# Altium PCB somiqboard.PcbDoc (part 8 of 10)
Units mm, origin at the board's own origin, x right, y up, seen from the top; angles counter-clockwise.
Board outline 110 x 96 mm, 4 copper layers (Top Layer, Ground_Plane, Power_Plane, Bottom Layer), stack 1.454 mm thick; 221 components, 356 nets, 1185 pads, 539 vias.
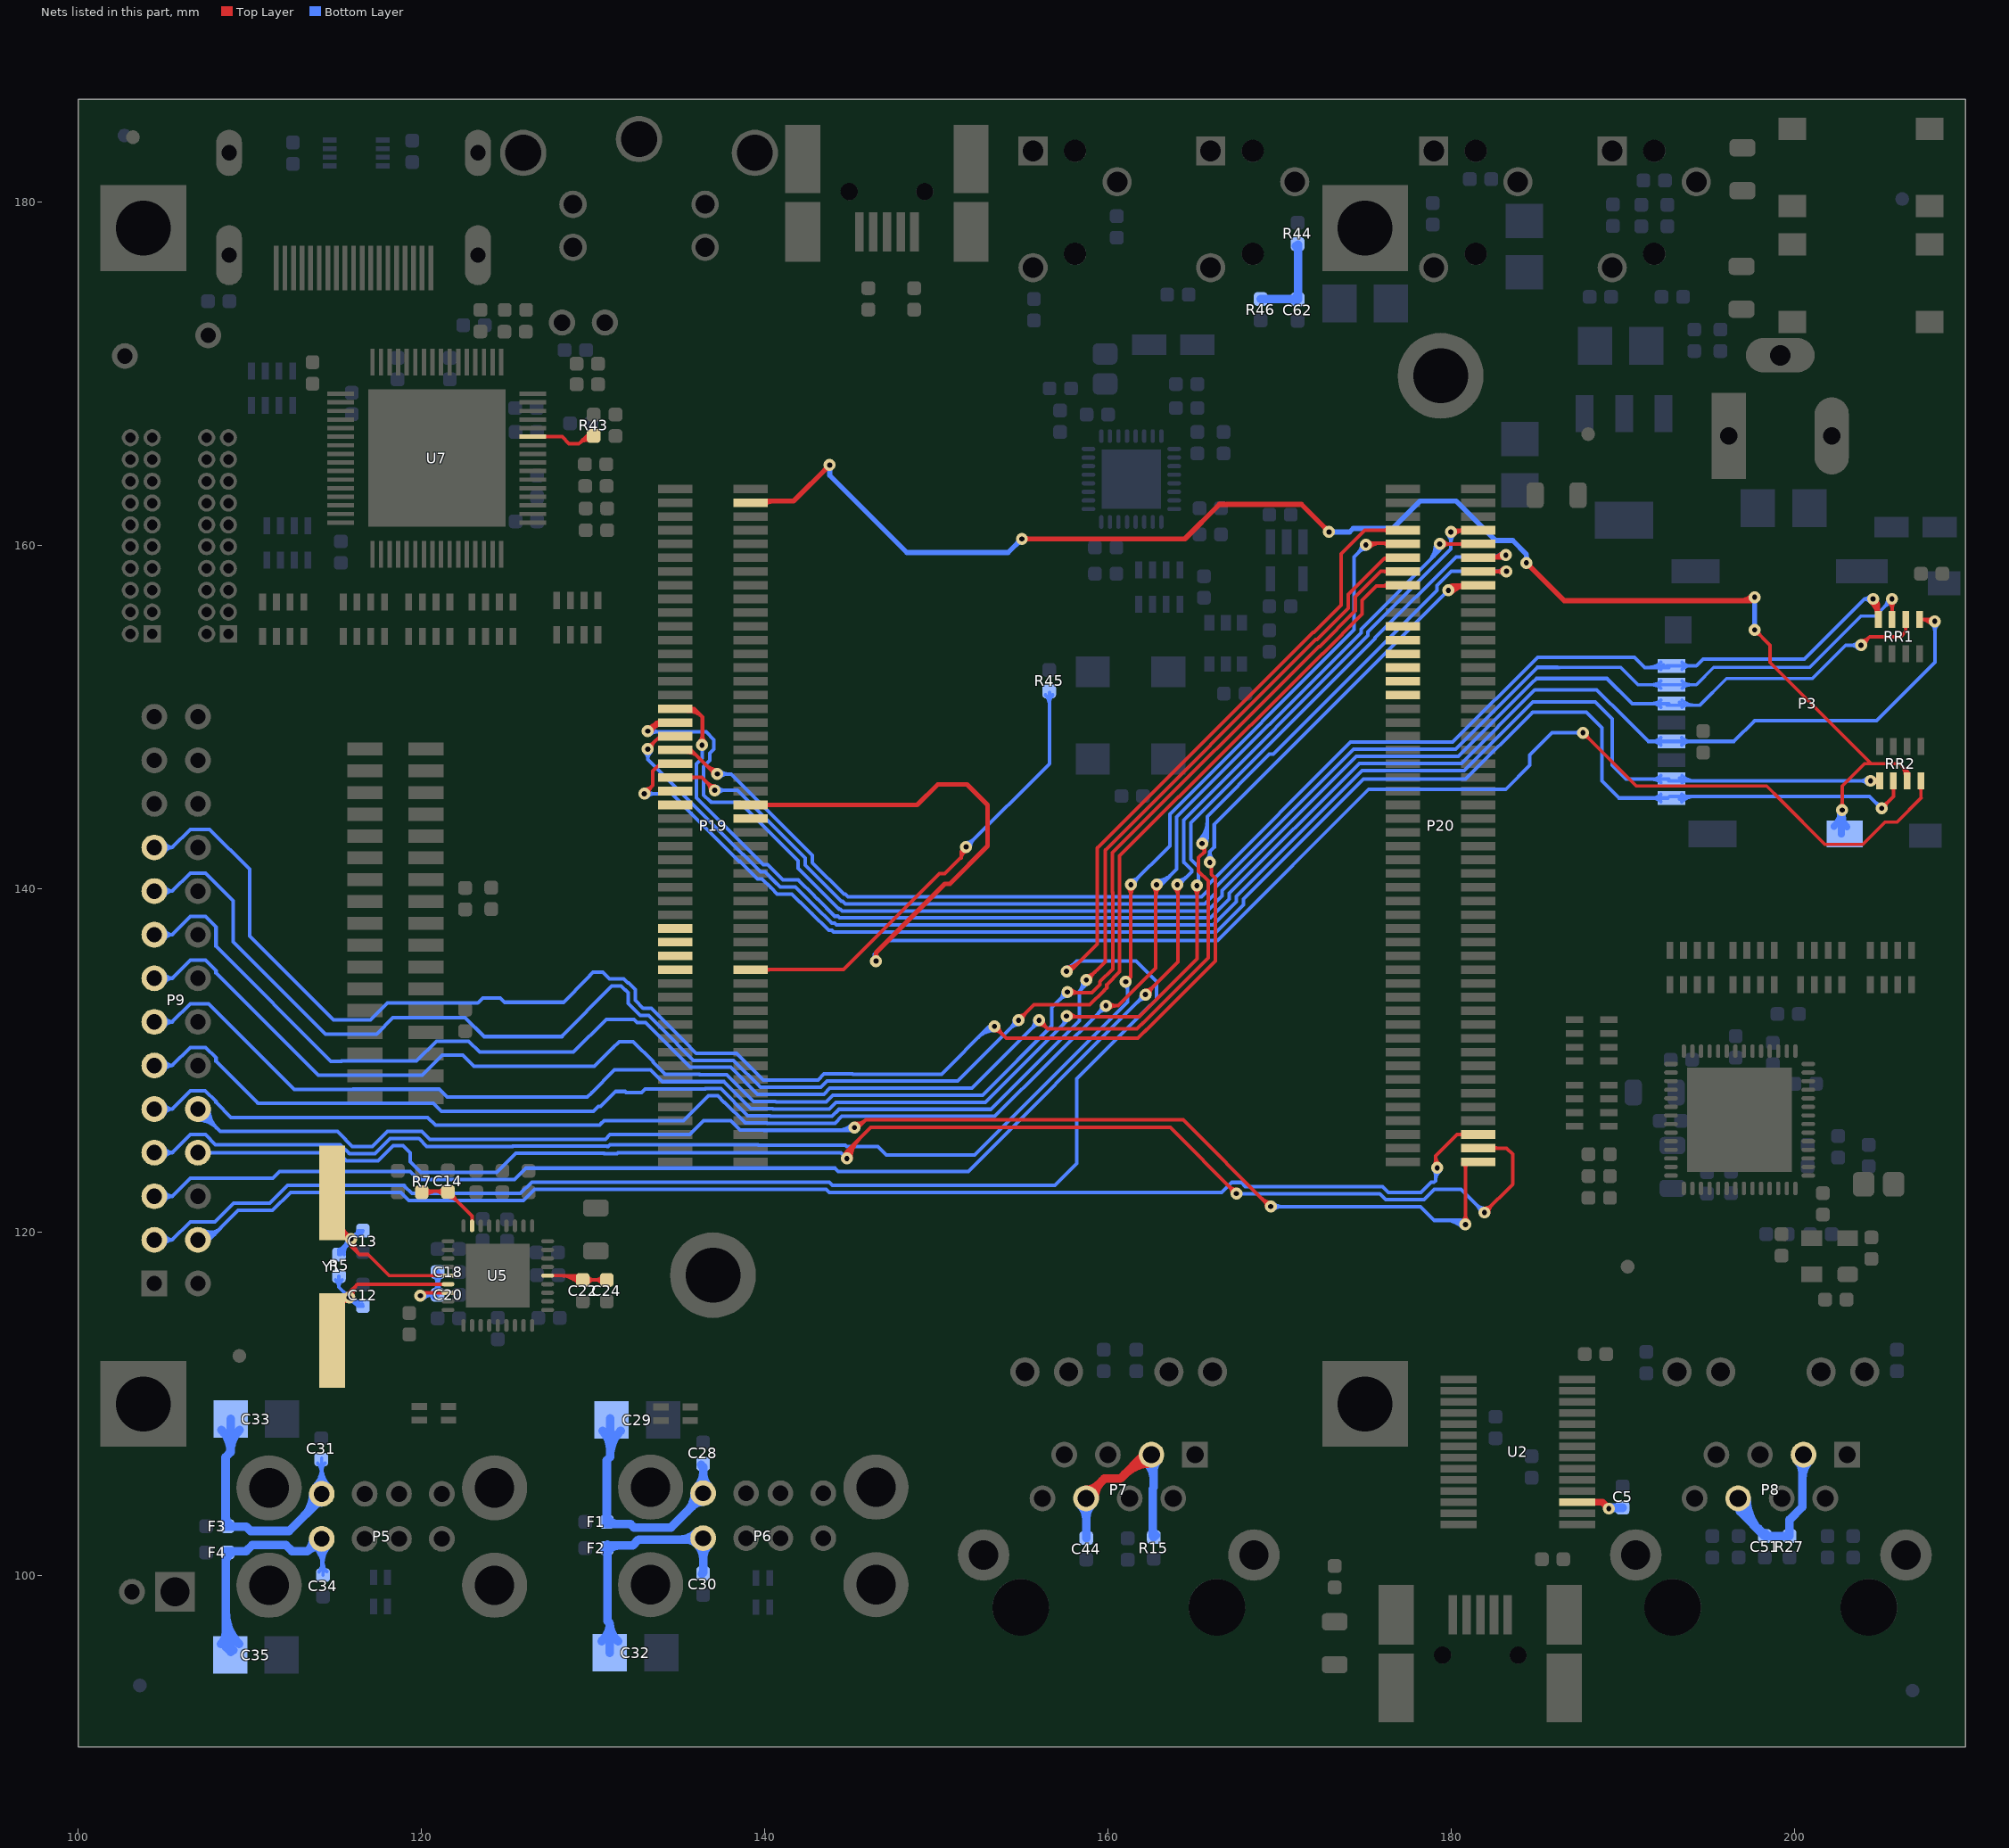
[diagram p10: the nets of this part, all layers, seen from the top]

## Via types
v1: diameter 0.7/0.7/0.7/0.7 (per signal layer), hole 0.3, Top Layer to Bottom Layer, tented both sides, 270 vias
v2: diameter 0.8, hole 0.3, Top Layer to Bottom Layer, tented both sides, 49 vias
v3: diameter 0.6/0.7/0.7/0.6 (per signal layer), hole 0.3, Top Layer to Bottom Layer, tented both sides, 47 vias
v4: diameter 0.6, hole 0.3, Top Layer to Bottom Layer, tented both sides, 43 vias
v5: diameter 1.1/1.1/1.1/1.1 (per signal layer), hole 0.6, Top Layer to Bottom Layer, tented both sides, 32 vias
v6: diameter 0.8/0.8/0.8/0.8 (per signal layer), hole 0.4, Top Layer to Bottom Layer, tented both sides, 31 vias
v7: diameter 0.9/0.9/0.9/0.9 (per signal layer), hole 0.5, Top Layer to Bottom Layer, tented both sides, 29 vias
v8: diameter 1.5/1.5/1.5/1.5 (per signal layer), hole 0.9, Top Layer to Bottom Layer, tented both sides, 14 vias
v9: diameter 1.2/1.2/1.2/1.2 (per signal layer), hole 0.6, Top Layer to Bottom Layer, tented both sides, 10 vias
v10: diameter 0.8/0.8/0.8/0.8 (per signal layer), hole 0.5, Top Layer to Bottom Layer, tented both sides, 6 vias
v11: diameter 1/1/1/1 (per signal layer), hole 0.5, Top Layer to Bottom Layer, tented both sides, 3 vias
v12: diameter 0.8/0.8/0.8/0.8 (per signal layer), hole 0.8, Top Layer to Bottom Layer, tented both sides, 2 vias
v13: diameter 1.2/1.2/1.2/1.2 (per signal layer), hole 1.2, Top Layer to Bottom Layer, tented both sides, 2 vias
v14: diameter 0.6/0.6/0.6/0.6 (per signal layer), hole 0.3, Top Layer to Bottom Layer, tented both sides, 1 vias

## Nets (pads, with @x,y where several pads share a name; then routed paths per layer and width w, separated by ;. In a path a pad name is that pad's centre, name@x,y a point inside that pad or via, vN(x,y) a via of type N, cw(c..) or ccw(c..) an arc to the next point about the centre after c; other vN are vias at no path point) (continued)
MCBSP3_DR: P9.10 P20.99 | length 93.8
  Top Layer w0.21: v1(145.25,126.1) 145.45,126.1 145.9,126.55 ; v1@145.254,126.134 ccw(c145.31,126.542) 145.601,126.251 ; v1@145.283,126.342 ccw(c145.383,127.067) 145.9,126.55 ; 168.996,121.954 ccw(c169.5,122.457) v1@169.5,121.745 ; 169.117,121.833 cw(c168.784,121.5) v1@169.255,121.5 ; v1(169.5,121.5) 169.45,121.5 164.4,126.55 145.9,126.55 ; v1@180.677,120.623 ccw(c180.259,121.041) 180.85,121.041 ccw(c181.441,121.041) v1@181.023,120.623 ; P20.99@180.7,124 180.85,123.85 v1(180.85,120.45) ; P20.99@180.747,123.997 cw(c180.5,123.75) 180.85,123.75 cw(c181.2,123.75) P20.99@180.953,123.997
  Bottom Layer w0.21: P9.10@106.985,126.533 cw(c106.985,124.976) 108.086,126.077 cw(c109.187,127.178) P9.10@107.63,127.178 ; P9.10@106.985,126.743 cw(c106.985,125.693) 107.728,126.435 cw(c108.47,127.178) P9.10@107.42,127.178 ; P9.10@106.985,127.178 108.288,125.875 115.125,125.875 115.595,125.405 ; 115.595,125.379 115.979,124.995 117.138,124.995 118.018,125.875 120.031,125.875 120.491,125.415 124.462,125.415 124.467,125.41 125.15,125.41 125.16,125.42 130.73,125.42 131,125.69 135.643,125.69 136.458,126.505 138.045,126.505 138.589,125.961 139.978,125.961 ; 139.994,125.945 v1@145.095,125.945 ; 144.284,125.945 ccw(c144.284,127.065) v1@145.076,126.273 ; 144.791,125.945 ccw(c144.791,126.558) v1@145.225,126.124 ; v1(169.5,121.5) 178.22,121.5 179.025,120.695 180.605,120.695 v1(180.85,120.45) ; v1@169.673,121.327 cw(c170.091,120.909) 170.091,121.5 cw(c170.091,122.091) v1@169.673,121.673 ; 179.667,120.695 cw(c179.667,119.267) v1@180.677,120.277 ; 180.174,120.695 cw(c180.174,119.774) v1@180.825,120.425
MCBSP3_DX: P9.4 P20.95 | length 85.3
  Top Layer w0.21: v1@179.026,123.923 ccw(c178.849,124.101) 179.1,124.101 ; v1(179.2,123.75) 179.1,123.75 179.1,124.45 ; v1@179.349,123.944 cw(c179.739,124.45) 179.1,124.45 ; P20.95@180.747,125.597 ccw(c180.5,125.35) 180.5,125.7 ccw(c180.5,126.05) P20.95@180.747,125.803 ; P20.95@181.6,125.7 180.35,125.7 179.1,124.45
  Bottom Layer w0.21: P9.4@106.985,119.558 107.63,119.558 108.322,120.25 ; P9.4@106.993,119.571 ccw(c107.303,120.108) 107.742,119.67 ; P9.4@107.098,119.753 ccw(c107.444,120.354) 107.935,119.863 ; P9.4@107.203,119.935 ccw(c107.586,120.599) 108.128,120.056 ; P9.4@107.308,120.117 ccw(c107.728,120.844) 108.322,120.25 ; v1@179.026,123.577 cw(c178.849,123.399) 179.1,123.399 ; 179.1,122.993 cw(c179.857,122.993) v1@179.36,123.565 ; v1(179.2,123.75) 179.1,123.75 179.1,123 179.015,122.915 178.855,122.915 178.26,122.32 176.36,122.32 176.02,122.66 168.016,122.66 167.771,122.905 167.229,122.905 166.644,122.32 143.78,122.32 143.595,122.505 126.605,122.505 125.95,121.85 124.726,121.85 124.721,121.855 124.178,121.855 124.174,121.85 123.02,121.85 123.015,121.855 119.286,121.855 118.82,122.32 112.38,122.32 111.338,121.278 109.328,121.278 108.322,120.272 108.322,120.25
MCBSP3_FSX: P9.8 P20.97 | length 93.2
  Top Layer w0.21: v1@144.625,124.3 cw(c145.187,124.3) 144.79,124.698 ; v1@144.685,124.516 ccw(c144.582,124.708) 144.8,124.708 ; v1(144.8,124.3) 144.8,124.708 ; v1@144.835,124.3 cw(c145.904,124.3) 145.148,125.056 ; v1@144.915,124.516 cw(c145.017,124.708) 144.8,124.708 ; v1@145.045,124.3 cw(c146.621,124.3) 145.506,125.415 ; v1@167.255,122.25 ccw(c166.664,122.25) 167.082,122.668 ccw(c167.5,123.086) v1@167.5,122.495 ; v1(167.5,122.25) 163.645,126.105 146.197,126.105 144.8,124.708 ; P20.97@181.6,124.9 183.25,124.9 183.6,124.55 183.6,122.8 v1(181.95,121.15) ; v1@181.95,121.395 ccw(c181.95,121.986) 182.368,121.568 ccw(c182.786,121.15) v1@182.195,121.15 ; P20.97@182.453,124.797 cw(c182.7,124.55) 182.7,124.9 cw(c182.7,125.25) P20.97@182.453,125.003
  Bottom Layer w0.21: P9.8@106.985,124.638 115.176,124.638 115.639,124.175 117.478,124.175 118.358,125.055 118.942,125.055 119.355,124.642 119.355,124.119 119.974,123.5 120.6,123.5 120.605,123.495 124.395,123.495 125.5,124.6 130.65,124.6 130.66,124.59 131.402,124.59 131.45,124.638 144.461,124.638 v1(144.8,124.3) ; v1(167.5,122.25) 175.85,122.25 176.19,121.91 178.43,121.91 179.025,122.505 179.775,122.505 179.79,122.49 ; 179.8,122.5 180.6,122.5 v1(181.95,121.15) ; v1@181.705,121.15 ccw(c181.114,121.15) 181.532,121.568 ccw(c181.95,121.986) v1@181.95,121.395
MCBSP4_CLKX: P19.72
MCBSP4_DR: P19.66
MCBSP4_DX: P19.68
MCBSP4_FSX: P19.70
MCBSP_CLKS: P19.71 R45.1 | length 30.8
  Top Layer w0.21: P19.71@139.2,135.3 144.6,135.3 150.2,140.9 150.5,140.9 151.465,141.865 151.465,142.165 ; P19.71@140.053,135.197 cw(c140.3,134.95) 140.3,135.3 cw(c140.3,135.65) P19.71@140.053,135.403 ; 151.465,141.799 cw(c151.885,141.799) v1@151.8,142.21 ; 151.465,142.057 cw(c151.831,142.057) v1@151.757,142.416 ; v1@151.516,142.376 cw(c151.316,142.313) 151.465,142.165 ; v1@151.676,142.216 ccw(c151.613,142.016) 151.465,142.165 ; v1(151.75,142.45) 151.465,142.165
  Bottom Layer w0.21: v1(151.75,142.45) 156.6,147.3 R45.1@156.6,151.45 ; v1@151.75,142.695 ccw(c151.75,143.286) 152.168,142.868 ccw(c152.586,142.45) v1@151.995,142.45 ; R45.1@156.382,151.302 cw(c155.857,150.777) 156.6,150.777 ; 156.6,150.821 cw(c157.281,150.821) R45.1@156.8,151.302
MCSPI1_CLK: P20.32
MCSPI1_CS0: P20.28
MCSPI1_CS1: P20.26
MCSPI1_CS2: P20.24
MCSPI1_SIMO: P20.22
MCSPI1_SOMI: P20.30
MMC1_CD: P3.10 P19.3 RR2.3 | length 100.3
  Top Layer w0.2: v3@197.7,154.9 cw(c197.7,154.417) 198.041,154.759 cw(c198.383,155.1) v3@197.9,155.1 ; v3(197.7,155.1) 198.6,154.2 198.6,153.2 204.5,147.3 ; v3@202.659,144.741 ccw(c202.317,145.083) 202.8,145.083 ccw(c203.283,145.083) v3@202.941,144.741 ; v3@202.8,144.7 202.8,146 204.1,147.3 204.5,147.3 ; 206.23,147.22 cw(c205.611,146.601) RR2.3@206.487,146.601 ; RR2.3@206.521,146.676 ccw(c206.369,146.85) 206.6,146.85 ; 206.572,146.878 cw(c206.294,146.601) RR2.3@206.687,146.601 ; RR2.3@206.6,146.4 206.6,146.85 ; 206.6,146.81 ccw(c206.796,146.81) RR2.3@206.657,146.671 ; 204.5,147.3 206.15,147.3 206.6,146.85
  Top Layer w0.3: P19.3@139.2,162.5 140.1,162.5 140.2,162.6 141.7,162.6 v3(143.8,164.7) ; P19.3@140.021,162.429 cw(c140.433,162.017) 140.433,162.6 ; v3@143.65,164.7 cw(c143.288,164.7) 143.544,164.444 cw(c143.8,164.188) v3@143.8,164.55 ; v3(155,160.4) 164.5,160.4 166.515,162.415 171.285,162.415 v3(172.9,160.8) ; v3@155.106,160.294 cw(c155.362,160.038) 155.362,160.4 cw(c155.362,160.762) v3@155.106,160.506 ; v3@172.75,160.8 ccw(c172.388,160.8) 172.644,161.056 ccw(c172.9,161.312) v3@172.9,160.95 ; v3@184.4,158.85 cw(c184.4,158.488) 184.656,158.744 cw(c184.912,159) v3@184.55,159 ; v3(184.4,159) 186.6,156.8 197.5,156.8 v3(197.7,157) ; 196.855,156.8 ccw(c196.855,157.845) v3@197.594,157.106
  Bottom Layer w0.3: v3@143.694,164.594 cw(c143.438,164.338) 143.8,164.338 cw(c144.162,164.338) v3@143.906,164.594 ; v3(143.8,164.7) 143.8,164.1 148.3,159.6 154.2,159.6 v3(155,160.4) ; v3@154.85,160.4 cw(c154.488,160.4) 154.744,160.144 cw(c155,159.888) v3@155,160.25 ; v3(172.9,160.8) 174.1,160.8 174.3,161 176.6,161 178.2,162.6 180.3,162.6 182.6,160.3 183.6,160.3 184.4,159.5 v3(184.4,159) ; v3@173.006,160.694 cw(c173.262,160.438) 173.262,160.8 cw(c173.262,161.162) v3@173.006,160.906 ; v3@184.294,159.106 ccw(c184.038,159.362) 184.4,159.362 ccw(c184.762,159.362) v3@184.506,159.106 ; v3@197.594,155.206 ccw(c197.338,155.462) 197.7,155.462 ccw(c198.062,155.462) v3@197.806,155.206 ; v3@197.594,156.894 cw(c197.338,156.638) 197.7,156.638 cw(c198.062,156.638) v3@197.806,156.894 ; v3(197.7,155.1) v3(197.7,157)
  Bottom Layer w0.4: P3.10@202.316,143.65 ccw(c201.598,144.55) v3@202.75,144.55 ; v3@202.681,144.294 cw(c203.031,144.2) v3@202.85,144.513 ; P3.10@202.75,143.2 v3@202.75,144.55 ; 202.75,144.238 cw(c203.162,144.238) v3@202.871,144.529 ; v3@202.75,144.407 ccw(c203.882,144.407) P3.10@203.082,143.607 ; v3(202.8,144.6) v3@202.75,144.55 ; 202.829,144.112 cw(c203.386,144.262) v3@202.887,144.55
MMC1_CLK: P3.5 P19.34 RR1.1 | length 101.8
  Top Layer w0.2: RR1.1@207.306,155.7 v1@208.1,155.7 ; RR1.1@207.355,155.7 cw(c207.355,154.755) v1@208.023,155.423 ; RR1.1@207.377,155.635 cw(c207.535,155.477) 207.535,155.7 ; RR1.1@207.377,155.776 ccw(c207.56,155.96) 207.56,155.7 ; v1@208.023,155.777 cw(c207.838,155.962) 207.838,155.7 cw(c207.838,155.238) v1@208.165,155.565
  Top Layer w0.21: P19.34@134.75,150.5 P19.34@134.8,150.5 135.9,150.5 ; P19.34@135.549,150.565 cw(c135.557,149.893) 136.032,150.368 ; P19.34@135.552,150.355 cw(c135.564,149.195) 136.385,150.015 ; P19.34@135.653,150.397 cw(c135.9,150.15) 135.9,150.5 ; P19.34@135.653,150.603 ccw(c135.9,150.85) 135.9,150.5 ; v1@136.191,148.559 ccw(c135.724,149.026) 136.385,149.026 ; v1(136.364,148.386) 136.385,148.365 136.385,150.015 ; 136.385,148.928 ccw(c136.907,148.928) v1@136.538,148.559 ; 135.9,150.5 136.385,150.015
  Bottom Layer w0.2: 186.3,151.6 186.312,151.612 186.413,151.612
  Bottom Layer w0.21: v1(136.364,148.386) 136.364,147.62 136.035,147.291 136.035,145.309 136.659,144.685 136.665,144.685 139.942,141.408 140.195,141.408 140.726,140.877 140.731,140.877 141.078,140.53 141.97,140.53 142.915,139.585 142.915,139.578 143.078,139.415 143.089,139.415 144.089,138.415 144.263,138.415 144.363,138.315 165.981,138.315 167.085,139.419 167.085,139.746 174.659,147.32 180.61,147.32 184.89,151.6 186.3,151.6 186.401,151.6 186.413,151.612 188.488,151.612 190.2,149.9 191.5,148.6 P3.5@192.85,148.6 196.5,148.6 197.7,149.8 204.8,149.8 208.2,153.2 v1(208.2,155.6) ; P3.5@192.241,148.391 ccw(c191.738,147.888) 191.738,148.6 ccw(c191.738,149.312) P3.5@192.241,148.809 ; P3.5@193.459,148.391 cw(c193.962,147.888) 193.962,148.6 cw(c193.962,149.312) P3.5@193.459,148.809 ; v1@208.027,155.427 cw(c207.609,155.009) 208.2,155.009 cw(c208.791,155.009) v1@208.373,155.427
MMC1_CMD: P3.3 P19.36 RR1.2 | length 101.3
  Top Layer w0.2: v1(203.9,154.2) 204.4,154.7 206.2,154.7 206.506,155.006 RR1.2@206.506,155.705 ; v1@203.9,154.45 ccw(c203.9,155.054) 204.327,154.627 ccw(c204.754,154.2) v1@204.15,154.2 ; RR1.2@206.435,155.335 cw(c206.265,155.164) 206.506,155.164 cw(c206.748,155.164) RR1.2@206.577,155.335
  Top Layer w0.21: v1@133.2,149.445 ccw(c133.2,150.036) 133.618,149.618 ccw(c134.036,149.2) v1@133.445,149.2 ; v1@133.205,149.205 cw(c134.05,148.36) P19.36@134.05,149.555 ; v1@133.25,149.15 v1(133.2,149.2) 133.7,149.7 ; v1@133.263,149.436 ccw(c133.415,150.001) 133.707,149.495 ; v1@133.436,149.136 cw(c134.014,148.981) 133.715,149.499 ; 133.563,149.563 cw(c134.05,149.077) P19.36@134.05,149.765 ; P19.36@133.947,149.597 ccw(c133.7,149.35) 133.7,149.7 ; P19.36@133.947,149.803 cw(c133.7,150.05) 133.7,149.7 ; P19.36@134.8,149.7 133.7,149.7
  Bottom Layer w0.2: P3.3@192.6,150.7 194.5,150.7 196.062,152.262 201.062,152.262 203,154.2 v1(203.9,154.2) ; P3.3@193.321,150.871 ccw(c193.733,151.283) 193.733,150.7 ccw(c193.733,150.317) P3.3@193.462,150.588 ; P3.3@193.462,151.012 ccw(c194.216,151.766) 194.216,150.7 ; v1@203.723,154.023 ccw(c203.296,153.596) 203.296,154.2 ccw(c203.296,154.804) v1@203.723,154.377
  Bottom Layer w0.21: v1@133.25,149.15 136.6,149.15 137.055,148.695 137.055,148.15 136.81,147.905 136.81,147.486 136.445,147.121 136.445,145.478 136.828,145.095 136.855,145.095 136.9,145.05 138.547,145.05 141.953,141.644 141.953,141.219 144.297,138.875 ; v1@133.373,149.026 cw(c133.671,148.729) 133.671,149.15 ; v1@133.373,149.373 ccw(c133.912,149.912) 133.912,149.15 ; 144.35,138.85 144.325,138.875 144.297,138.875 ; 184.721,152.01 180.441,147.73 174.49,147.73 166.675,139.915 166.675,139.589 165.811,138.725 144.533,138.725 144.433,138.825 144.347,138.825 144.297,138.875 ; 184.721,152.011 184.971,152.262 189.1,152.262 190.562,150.8 P3.3@192.7,150.8 ; P3.3@192.241,150.591 ccw(c191.738,150.088) 191.738,150.8 ccw(c191.738,151.512) P3.3@192.241,151.009
MMC1_DATA0: P3.7 P19.38 RR2.1 | length 93.9
  Top Layer w0.2: v1(204.45,146.3) RR2.1@204.9,146.3 ; v1@204.662,146.168 cw(c204.9,146.02) RR2.1@204.9,146.3 ; v1@204.662,146.432 ccw(c204.9,146.58) RR2.1@204.9,146.3 ; v1@204.744,146.3 ccw(c204.744,146.544) RR2.1@204.916,146.371 ; v1@204.747,146.3 cw(c204.747,146.061) RR2.1@204.916,146.23
  Top Layer w0.21: v1(133.2,148.15) 133.495,148.445 ; v1@133.237,148.392 ccw(c133.283,148.688) 133.495,148.476 ; v1@133.267,148.386 ccw(c133.33,148.61) 133.495,148.445 ; v1@133.434,148.224 cw(c133.672,148.3) 133.495,148.476 ; v1@133.436,148.217 cw(c133.66,148.28) 133.495,148.445 ; P19.38@134.8,148.9 133.919,148.9 133.495,148.476
  Bottom Layer w0.2: P3.7@192.7,146.3 v1(204.45,146.3) v1@204.45,146.25 ; P3.7@193.321,146.471 ccw(c193.733,146.883) 193.733,146.3 ccw(c193.733,145.917) P3.7@193.462,146.188 ; P3.7@193.462,146.612 ccw(c194.216,147.366) 194.216,146.3 ; v1@204.273,146.123 ccw(c203.846,145.696) 203.846,146.3 ccw(c203.846,146.904) v1@204.273,146.477
  Bottom Layer w0.21: v1@133.027,147.977 cw(c132.609,147.559) 133.2,147.559 cw(c133.791,147.559) v1@133.373,147.977 ; v1(133.2,148.15) 133.2,147.55 135.65,145.1 ; 135.625,145.139 136.17,144.593 136.17,144.58 138.73,142.02 138.75,142.02 139.772,140.998 140.025,140.998 140.556,140.467 140.561,140.467 140.908,140.12 141.8,140.12 142.505,139.415 142.505,139.408 142.908,139.005 142.92,139.005 143.92,138.005 144.093,138.005 144.193,137.905 166.151,137.905 167.495,139.249 167.495,139.576 174.819,146.9 180.77,146.9 184.77,150.9 188.4,150.9 189.4,149.9 189.4,147.2 190.2,146.4 P3.7@192.7,146.4 ; P3.7@192.241,146.191 ccw(c191.738,145.688) 191.738,146.4 ccw(c191.738,147.112) P3.7@192.241,146.609
MMC1_DATA1: P3.8 P19.42 RR2.2 | length 96.6
  Top Layer w0.2: v3(205.1,144.7) 205.787,145.387 RR2.2@205.787,146.301 ; v3@205.1,144.9 ccw(c205.1,145.383) 205.441,145.041 ccw(c205.783,144.7) v3@205.3,144.7 ; RR2.2@205.716,145.93 cw(c205.545,145.759) 205.787,145.759 cw(c206.028,145.759) RR2.2@205.857,145.93
  Top Layer w0.21: v1(133,145.55) 133.495,146.045 133.495,146.876 133.919,147.3 P19.42@134.8,147.3 P19.42@134.85,147.25 ; v1@133,145.795 ccw(c133,146.386) 133.418,145.968 ccw(c133.836,145.55) v1@133.245,145.55
  Bottom Layer w0.2: 186.4,150.3 186.412,150.312
  Bottom Layer w0.21: v1(133,145.55) 134.6,145.55 135,145.15 135.76,144.39 135.76,144.371 138.521,141.61 138.58,141.61 139.602,140.588 139.855,140.588 140.386,140.057 140.391,140.057 140.738,139.71 141.59,139.71 142.062,139.238 142.095,139.238 142.738,138.595 142.75,138.595 143.75,137.595 143.923,137.595 144.023,137.495 166.32,137.495 167.905,139.08 167.905,139.406 174.899,146.4 180.85,146.4 184.762,150.312 186.412,150.312 ; v1@133.173,145.377 cw(c133.591,144.959) 133.591,145.55 cw(c133.591,146.141) v1@133.173,145.723 ; 186.4,150.3 187.9,150.3 188.8,149.4 188.8,146.3 189.8,145.3 192.65,145.3 192.75,145.4 204.4,145.4 v3(205.1,144.7) ; P3.8@192.241,145.091 ccw(c191.738,144.588) 191.738,145.3 ccw(c191.738,146.012) P3.8@192.241,145.509 ; P3.8@193.31,145.24 cw(c193.697,144.853) 193.697,145.4 ; P3.8@193.459,145.091 cw(c194.204,144.346) 194.204,145.4 ; P3.8@193.459,145.509 ccw(c193.721,145.771) 193.721,145.4 ; v3@204.905,144.7 ccw(c204.434,144.7) 204.767,145.033 ccw(c205.1,145.366) v3@205.1,144.895
MMC1_DATA2: P3.1 P19.40 RR1.4 | length 92.4
  Top Layer w0.2: v1@204.435,156.713 cw(c203.511,155.667) RR1.4@204.906,155.667 ; v1@204.567,156.863 cw(c203.903,156.11) RR1.4@204.906,156.11 ; v1(204.6,156.9) 204.906,156.594 ; v1@204.665,156.659 cw(c204.729,156.417) 204.906,156.594 ; v1@204.699,157.012 cw(c204.294,156.554) 204.906,156.554 ; RR1.4@204.835,156.076 ccw(c204.665,156.247) 204.906,156.247 ccw(c205.148,156.247) RR1.4@204.977,156.076 ; v1@204.841,156.835 ccw(c205.083,156.771) 204.906,156.594 ; RR1.4@204.906,155.705 204.906,156.594
  Top Layer w0.21: P19.40@134.65,148.1 P19.40@134.8,148.1 135.724,148.1 137.124,146.7 v1(137.25,146.7) ; P19.40@135.55,147.955 cw(c135.55,147.186) 136.094,147.73 ; 136.617,147.207 ccw(c137.25,147.84) v1@137.25,146.945 ; 136.92,146.903 cw(c136.717,146.7) v1@137.005,146.7
  Bottom Layer w0.2: P3.1@192.6,153 P3.1@192.85,153 194.3,153 194.7,153.4 200.6,153.4 204.1,156.9 ; P3.1@193.462,152.788 cw(c193.974,152.276) 193.974,153 cw(c193.974,153.724) P3.1@193.462,153.212 ; v1@204.4,156.75 ccw(c204.1,156.525) 204.1,156.9 ; v1@204.4,157.05 cw(c204.1,157.275) 204.1,156.9 ; v1@204.75,156.9 v1(204.6,156.9) 204.1,156.9
  Bottom Layer w0.21: v1(137.25,146.7) 138.057,146.7 142.8,141.957 142.8,141.532 144.637,139.695 144.723,139.695 144.873,139.545 165.471,139.545 165.855,139.929 165.855,140.255 174.15,148.55 180.1,148.55 185.05,153.5 190.7,153.5 191.3,152.9 P3.1@192.7,152.9 ; v1@137.423,146.526 cw(c137.841,146.108) 137.841,146.7 cw(c137.841,147.291) v1@137.423,146.873 ; 191.496,152.9 ccw(c191.496,153.954) P3.1@192.241,153.209 ; 191.979,152.9 cw(c191.979,152.529) P3.1@192.241,152.791 ; 192.003,152.9 ccw(c192.003,153.447) P3.1@192.39,153.06
MMC1_DATA3: P3.2 P19.44 RR1.3 | length 90.9
  Top Layer w0.2: v1@205.523,156.723 cw(c205.081,156.281) 205.706,156.281 ; RR1.3@205.635,156.076 ccw(c205.465,156.247) 205.706,156.247 ccw(c205.948,156.247) RR1.3@205.777,156.076 ; v1@205.7,156.721 205.7,156.787 v1@205.706,156.794 ; RR1.3@205.706,155.705 v1@205.706,156.794 ; 205.706,156.311 cw(c206.289,156.311) v1@205.877,156.723 ; v1@205.706,156.794 205.706,156.806 205.712,156.8 v1@205.706,156.794
  Top Layer w0.21: P19.44@134.8,146.5 P19.44@134.9,146.5 ; P19.44@134.85,146.55 P19.44@134.9,146.5 ; P19.44@135.653,146.397 cw(c135.9,146.15) 135.9,146.5 cw(c135.9,146.85) P19.44@135.653,146.603 ; v1@136.855,145.75 ccw(c136.263,145.75) 136.681,146.168 ccw(c137.1,146.586) v1@137.1,145.995 ; v1(137.1,145.75) 136.349,146.5 P19.44@134.9,146.5
  Bottom Layer w0.2: 186.2,152.912 186.312,152.912 ; 186.3,152.9 186.312,152.912 ; P3.2@192.238,151.688 ccw(c191.726,151.176) 191.726,151.9 ccw(c191.726,152.624) P3.2@192.238,152.112 ; P3.2@193.462,151.688 cw(c193.974,151.176) 193.974,151.9 cw(c193.974,152.624) P3.2@193.462,152.112 ; 205.26,156.44 ccw(c204.8,156.9) v1@205.45,156.9 ; 205.306,156.487 cw(c205.7,156.093) v1@205.7,156.65 ; 205.45,156.65 205.45,156.631 204.719,155.9 203.9,155.9 200.912,152.912 195.312,152.912 194.3,151.9 190.9,151.9 189.888,152.912 186.312,152.912 ; v1@205.7,156.721 205.7,156.787 v1@205.9,156.988
  Bottom Layer w0.21: v1(137.1,145.75) 137.1,145.8 137.15,145.75 138.427,145.75 142.363,141.813 142.363,141.388 144.467,139.285 144.553,139.285 144.703,139.135 165.641,139.135 166.265,139.759 166.265,140.085 174.32,148.14 180.271,148.14 184.311,152.18 184.802,152.672 ; v1@137.273,145.576 cw(c137.692,145.158) 137.692,145.75 ; v1@137.273,145.923 ccw(c137.691,146.34) 137.691,145.75 ; 184.802,152.672 185.042,152.912 186.2,152.912
  other v1: 205.7,156.9
MMC1_DATA4: P19.47 RR2.4 | length 102.1
  Top Layer w0.2: v3@187.7,148.9 cw(c187.7,148.417) 188.041,148.759 cw(c188.383,149.1) v3@187.9,149.1 ; v3(187.7,149.1) 190.8,146 198.4,146 199.185,145.215 201.8,142.6 204,142.6 205.3,143.9 206,143.9 207.387,145.287 ; RR2.4@207.316,145.93 cw(c207.145,145.759) 207.387,145.759 cw(c207.628,145.759) RR2.4@207.457,145.93 ; RR2.4@207.387,146.301 207.387,145.287 ; 207.4,145.3 207.387,145.287
  Top Layer w0.27: P19.47@139.2,144.9 148.9,144.9 150.1,146.1 151.8,146.1 153,144.9 153,142.5 150.8,140.3 150.5,140.3 146.5,136.3 v3(146.5,135.8) ; P19.47@140.031,144.819 cw(c140.228,144.622) 140.228,144.9 cw(c140.228,145.178) P19.47@140.031,144.981 ; v3@146.383,135.917 ccw(c146.102,136.198) 146.5,136.198 ccw(c146.898,136.198) v3@146.617,135.917
  Bottom Layer w0.2: v3@146.4,135.6 146.4,136.2 ; v3@146.556,135.992 cw(c146.617,136.2) 146.4,136.2 ; v3@187.559,148.959 ccw(c187.217,148.617) 187.217,149.1 ccw(c187.217,149.583) v3@187.559,149.241 ; v3(187.7,149.1) 185.9,149.1 184.6,147.8 184.6,147.2 183.2,145.8 175.2,145.8 166.4,137 147.2,137 146.4,136.2
MMC1_DATA5: P19.46
MMC1_DATA6: P19.49
MMC1_DATA7: P19.48
MMC2_CLK: P9.21 P20.15 | length 114.7
  Top Layer w0.21: v1@153.4,131.755 cw(c153.4,131.164) 153.818,131.582 cw(c154.236,132) v1@153.645,132 ; v1(153.4,132) 154.1,131.3 161.75,131.3 162.15,131.7 ; 162.136,131.7 162.15,131.7 ; 162.25,131.8 162.15,131.7 ; v1@166.05,141.55 166.05,140.856 166.265,140.641 166.265,135.805 162.16,131.7 162.15,131.7 ; v1@179.726,157.524 cw(c180.152,157.098) 180.152,157.7 ; v1(179.85,157.4) 180.15,157.7 ; v1@179.875,157.375 cw(c180.659,156.591) P20.15@180.659,157.7 ; v1@179.913,157.637 ccw(c179.977,157.873) 180.15,157.7 ; v1@180.023,157.227 cw(c181.166,156.084) P20.15@181.166,157.7 ; v1@180.087,157.463 cw(c180.323,157.527) 180.15,157.7 ; P20.15@180.747,157.597 ccw(c180.5,157.35) 180.5,157.7 ccw(c180.5,158.05) P20.15@180.747,157.803 ; P20.15@181.6,157.7 180.15,157.7
  Bottom Layer w0.21: P9.21@104.445,142.418 105.493,142.418 ; P9.21@105.021,142.127 cw(c105.493,141.889) 105.493,142.418 ; P9.21@105.021,142.709 ccw(c105.493,142.947) 105.493,142.418 ; 132.042,134.525 131.802,134.765 130.961,134.765 130.571,135.155 130.01,135.155 129.831,134.975 129.831,134.957 129.645,134.771 129.645,134.765 128.28,133.4 124.859,133.4 124.614,133.645 124.179,133.645 124.174,133.65 123.591,133.65 123.291,133.35 118.033,133.35 117.053,132.37 114.88,132.37 110,137.25 110,141.146 107.673,143.473 106.548,143.473 105.493,142.418 ; 132.081,134.525 132.465,134.141 132.465,133.509 132.929,133.045 133.415,133.045 135.33,131.129 135.33,131.12 136.02,130.43 138.368,130.43 139.933,128.865 143.117,128.865 143.472,129.22 145.14,129.22 145.145,129.215 150.315,129.215 153.05,131.95 v1@153.4,131.95 ; 152.47,131.37 cw(c153.4,130.439) v1@153.4,131.755 ; 152.828,131.728 cw(c153.4,131.156) v1@153.4,131.965 ; v1@165.777,141.723 ccw(c165.359,142.141) 165.95,142.141 ccw(c166.541,142.141) v1@166.123,141.723 ; v1(165.95,141.55) 165.95,142.174 166.21,142.434 166.21,143.76 v1(179.85,157.4)
MMC2_CMD: P9.19 P20.16 | length 103.4
  Top Layer w0.21: v1(154.8,132.35) 155.705,133.255 157.981,133.255 ; v1@154.8,132.595 ccw(c154.8,133.186) 155.218,132.768 ccw(c155.636,132.35) v1@155.045,132.35 ; 157.986,133.25 158.95,133.25 159.8,134.1 ; 159.805,134.105 159.95,134.25 159.95,134.426 160.7,135.176 160.7,139.974 ; 160.695,139.979 160.695,141.945 164.111,145.361 ; 164.15,145.361 172.504,153.715 ; 172.527,153.715 174.83,156.018 174.83,156.83 175.65,157.65 177.15,157.65 P20.16@177.2,157.7 ; 175.979,157.65 ccw(c175.979,158.171) P20.16@176.347,157.803
  Bottom Layer w0.21: P9.19@104.445,139.878 105.493,139.878 ; P9.19@105.021,139.587 cw(c105.493,139.349) 105.493,139.878 ; P9.19@105.021,140.169 ccw(c105.493,140.407) 105.493,139.878 ; 131.872,134.115 131.633,134.355 131.105,134.355 128.175,131.425 128.2,131.4 123.661,131.4 122.561,132.5 119.059,132.5 119.055,132.504 118.347,132.504 117.393,131.55 114.42,131.55 109.05,136.92 109.05,139.305 107.422,140.933 106.548,140.933 105.493,139.878 ; 131.911,134.115 132.055,133.971 132.055,133.339 132.759,132.635 133.245,132.635 134.92,130.959 ; 134.92,130.95 135.85,130.02 138.198,130.02 139.763,128.455 143.287,128.455 143.642,128.81 144.97,128.81 144.975,128.805 151.255,128.805 v1(154.8,132.35) ; v1@154.555,132.35 cw(c153.964,132.35) 154.382,131.932 cw(c154.8,131.514) v1@154.8,132.105
MMC2_DATA0: P9.17 P20.13 | length 115.5
  Top Layer w0.21: v1@156,132.105 cw(c156,131.514) 156.418,131.932 cw(c156.836,132.35) v1@156.245,132.35 ; v1(156,132.35) 156.5,131.85 161.706,131.85 161.971,132.115 161.985,132.115 162.08,132.21 162.09,132.21 165.855,135.975 165.855,140.471 165.295,141.031 165.295,141.821 165.65,142.176 165.65,142.4 v1@165.45,142.6 ; v1@165.445,142.411 cw(c165.385,142.153) 165.65,142.153 ; P20.13@181.6,158.5 183.25,158.5 v1(183.24,158.51) ; P20.13@182.453,158.397 cw(c182.7,158.15) 182.7,158.5 cw(c182.7,158.85) P20.13@182.453,158.603 ; 182.626,158.5 ccw(c182.626,159.124) v1@183.067,158.683 ; 182.672,158.5 cw(c182.672,157.941) v1@183.067,158.336
  Bottom Layer w0.21: P9.17@104.445,137.338 105.493,137.338 ; P9.17@105.021,137.047 cw(c105.493,136.809) 105.493,137.338 ; P9.17@105.021,137.629 ccw(c105.493,137.867) 105.493,137.338 ; 144.8,128.395 152.095,128.395 156,132.3 v1(156,132.35) ; 144.8,128.4 143.812,128.4 143.457,128.045 139.593,128.045 138.028,129.61 135.68,129.61 134.51,130.78 134.51,130.79 133.075,132.225 132.589,132.225 132.404,132.41 130.78,132.41 128.87,130.5 123.401,130.5 122.766,131.135 120.886,131.135 119.726,129.975 115.357,129.975 115.352,129.97 114.72,129.97 108.04,136.65 108.04,137.775 107.422,138.393 106.548,138.393 105.493,137.338 ; 155.546,131.846 ccw(c155.043,132.35) v1@155.755,132.35 ; 155.667,131.967 cw(c156,131.634) v1@156,132.105 ; v1@165.327,142.823 ccw(c164.184,143.966) 165.8,143.966 ; v1@165.475,142.675 ccw(c164.691,143.459) 165.8,143.459 ; v1(165.5,142.65) 165.8,142.95 165.8,144.23 169.43,147.86 169.66,147.86 179.195,157.395 179.195,157.671 180.024,158.5 183.25,158.5 v1(183.24,158.51) ; v1@165.624,142.526 ccw(c165.198,142.952) 165.8,142.952 ; 182.626,158.5 ccw(c182.626,159.124) v1@183.067,158.683 ; 182.672,158.5 cw(c182.672,157.941) v1@183.067,158.336
MMC2_DATA1: P9.15 P20.14 | length 100.2
  Top Layer w0.21: v1(157.65,134) 157.7,133.95 159.07,133.95 159.39,134.27 159.39,134.275 159.54,134.425 159.54,134.596 160.29,135.346 160.29,139.804 160.285,139.809 160.285,142.115 172.295,154.125 172.357,154.125 174.42,156.188 174.42,157 175.92,158.5 P20.14@176.95,158.5 ; v1@157.823,133.827 cw(c158.121,133.529) 158.121,133.95 ; v1@157.823,134.173 ccw(c158.362,134.712) 158.362,133.95 ; P20.14@176.347,158.397 ccw(c176.1,158.15) 176.1,158.5 ccw(c176.1,158.85) P20.14@176.347,158.603
  Bottom Layer w0.21: P9.15@104.445,134.798 105.493,134.798 ; P9.15@105.021,134.507 cw(c105.493,134.269) 105.493,134.798 ; P9.15@105.021,135.089 ccw(c105.493,135.327) 105.493,134.798 ; v1@157.405,134 cw(c156.814,134) 157.232,133.582 cw(c157.65,133.164) v1@157.65,133.755 ; v1(157.65,134) 156.75,133.1 156.75,132.024 152.711,127.985 143.995,127.985 143.595,127.585 140.673,127.585 140.638,127.62 139.369,127.62 137.804,129.185 136.219,129.185 136.204,129.2 134.202,129.2 133.502,129.9 133.502,129.948 132.345,131.105 131.529,131.105 131.162,130.738 131.145,130.738 130.087,129.68 123.061,129.68 122.426,130.315 121.226,130.315 120.066,129.155 115.696,129.155 115.691,129.15 113.996,129.15 108.04,135.106 108.04,135.235 107.422,135.853 106.548,135.853 105.493,134.798
MMC2_DATA2: P9.13 P20.11 | length 109.9
  Top Layer w0.21: v1(157.6,132.6) v1@157.65,132.55 ; v1@157.675,132.525 v1@157.65,132.55 ; v1@157.773,132.427 cw(c158.071,132.129) 158.071,132.55 ; v1@157.773,132.773 ccw(c158.312,133.312) 158.312,132.55 ; v1@165.027,140.027 cw(c164.609,139.609) 165.2,139.609 cw(c165.791,139.609) v1@165.373,140.027 ; v1(165.2,140.2) 165.2,135.924 161.821,132.545 159.629,132.545 159.624,132.55 v1@157.65,132.55 ; P20.11@181.6,159.3 183.15,159.3 v1@183.2,159.35 ; P20.11@182.247,159.3 ccw(c182.247,160.403) v1@183.026,159.623 ; P20.11@182.453,159.197 cw(c182.7,158.95) 182.7,159.3 cw(c182.7,159.65) P20.11@182.453,159.403 ; 182.754,159.3 ccw(c182.754,159.896) v1@183.175,159.474 ; v1@183.2,159.35 v1(183.2,159.45)
  Bottom Layer w0.21: P9.13@104.445,132.258 105.493,132.258 ; P9.13@105.021,131.967 cw(c105.493,131.729) 105.493,132.258 ; P9.13@105.021,132.549 ccw(c105.493,132.787) 105.493,132.258 ; 129.926,128.126 129.68,127.88 124.141,127.88 124.136,127.875 121.51,127.875 121.05,128.335 116.036,128.335 116.031,128.33 112.596,128.33 107.613,133.313 106.548,133.313 105.493,132.258 ; 129.927,128.126 131.262,129.461 133.361,129.461 134.048,128.775 137.635,128.775 139.2,127.21 140.468,127.21 140.503,127.175 143.765,127.175 144.165,127.575 152.881,127.575 157.403,132.097 ; v1@157.414,132.441 cw(c157.222,132.278) 157.4,132.1 157.6,132.3 v1(157.6,132.6) ; v1(165.2,140.2) 165.3,140.3 165.3,141.274 164.845,141.729 164.845,143.855 175.58,154.59 175.58,154.636 180.294,159.35 v1@183.2,159.35 ; 182.367,159.35 ccw(c182.367,160.282) v1@183.026,159.623 ; 182.849,159.35 cw(c182.849,159.099) v1@183.026,159.276 ; v1@183.2,159.35 v1(183.2,159.45)
MMC2_DATA3: P9.11 P20.12 | length 98.1
  Top Layer w0.21: v1@158.75,134.945 ccw(c158.75,135.657) 159.254,135.154 ; v1@158.8,134.7 159.85,135.75 159.85,142.26 172.125,154.535 172.165,154.535 ; v1@158.995,134.7 cw(c159.466,134.7) 159.133,135.033 ; 172.188,154.535 174.01,156.357 174.01,157.17 176.09,159.25 ; P20.12@176.328,159.379 cw(c176.09,159.534) 176.09,159.25 ; P20.12@176.95,159.25 176.09,159.25
  Bottom Layer w0.21: P9.11@104.445,129.718 105.493,129.718 ; P9.11@105.021,129.427 cw(c105.493,129.189) 105.493,129.718 ; P9.11@105.021,130.009 ccw(c105.493,130.247) 105.493,129.718 ; 139.3,126.781 140.317,126.781 140.333,126.765 143.935,126.765 144.335,127.165 153.191,127.165 158.35,132.324 158.35,134.04 ; 139.3,126.8 139.03,126.8 137.465,128.365 136.559,128.365 136.544,128.35 133.05,128.35 132.85,128.15 132.522,128.15 132.521,128.151 131.925,128.151 131.871,128.205 131.328,128.205 130.945,127.821 130.454,127.33 130.31,127.33 130.04,127.06 124.481,127.06 124.476,127.055 121.17,127.055 120.71,127.515 116.376,127.515 116.371,127.51 110.482,127.51 108.04,129.952 108.04,130.155 107.422,130.773 106.548,130.773 105.493,129.718 ; v1@158.513,134.638 cw(c157.909,134.482) 158.35,134.04 ; 158.61,134.3 ccw(c158.321,134.589) v1@158.716,134.691 ; v1(158.75,134.7) 158.75,134.44 158.35,134.04
MMC2_DATA4: P9.9 P20.9 | length 108.2
  Top Layer w0.21: v1(159.9,133.2) 160.6,133.2 162.8,135.4 v1@162.8,140.3 ; v1@160.073,133.027 cw(c160.491,132.609) 160.491,133.2 cw(c160.491,133.791) v1@160.073,133.373 ; v1@162.677,140.077 cw(c162.379,139.779) 162.8,139.779 ; 162.8,139.538 cw(c163.562,139.538) v1@163.023,140.077 ; v1(179.35,160.1) P20.9@181.6,160.1 ; v1@179.523,159.927 cw(c179.941,159.509) 179.941,160.1 cw(c179.941,160.691) v1@179.523,160.273 ; P20.9@180.747,159.997 ccw(c180.5,159.75) 180.5,160.1 ccw(c180.5,160.45) P20.9@180.747,160.203
  Bottom Layer w0.21: P9.9@104.445,127.178 105.493,127.178 ; P9.9@105.021,126.887 cw(c105.493,126.649) 105.493,127.178 ; P9.9@105.021,127.469 ccw(c105.493,127.707) 105.493,127.178 ; 107.15,128.233 106.548,128.233 105.493,127.178 ; 107.15,128.25 107.405,128.25 108.04,127.615 108.04,127.56 108.91,126.69 116.71,126.69 116.715,126.695 120.371,126.695 120.831,126.235 124.816,126.235 124.821,126.24 130.39,126.24 130.48,126.33 ; 130.55,126.4 130.48,126.33 ; 140.147,126.371 138.879,126.371 137.679,127.571 137.655,127.571 137.271,127.955 136.729,127.955 135.284,126.51 130.649,126.51 130.48,126.341 130.48,126.33 ; 140.164,126.355 144.105,126.355 144.505,126.755 153.405,126.755 v1(159.9,133.2) ; v1@159.655,133.201 cw(c159.064,133.203) 159.48,132.783 cw(c159.897,132.364) v1@159.899,132.955 ; v1(162.85,140.25) 162.85,140.3 163.174,140.3 164.025,141.151 164.025,144.194 174.76,154.929 174.76,155.14 179.35,159.73 ; v1@162.85,140.285 ccw(c162.85,141.03) 163.377,140.503 ; v1@162.85,140.495 ccw(c162.85,141.747) 163.735,140.862 ; 178.67,159.05 ccw(c177.62,160.1) v1@179.105,160.1 ; 179.028,159.408 ccw(c178.337,160.1) v1@179.315,160.1 ; v1@179.254,159.874 cw(c179.193,159.73) 179.35,159.73 ; v1(179.35,160.1) 179.35,159.73 ; v1@179.446,159.874 ccw(c179.507,159.73) 179.35,159.73
MMC2_DATA5: P9.7 P20.10 | length 103.1
  Top Layer w0.21: v1(161.05,134.6) 161.35,134.9 ; v1@161.113,134.837 ccw(c161.177,135.073) 161.35,134.9 ; v1@161.177,140.077 cw(c160.759,139.659) 161.35,139.659 cw(c161.941,139.659) v1@161.523,140.077 ; v1@161.287,134.663 cw(c161.523,134.727) 161.35,134.9 ; v1(161.35,140.25) 161.35,134.9 ; v1(175.05,160.05) 175.15,160.15 P20.10@177.2,160.15 ; v1@175.223,159.877 cw(c175.883,159.217) 175.883,160.15 ; v1@175.223,160.223 ccw(c175.4,160.4) 175.4,160.15 ; 175.979,160.15 cw(c175.979,159.629) P20.10@176.347,159.997
  Bottom Layer w0.21: P9.7@104.445,124.638 105.493,124.638 ; P9.7@105.021,124.347 cw(c105.493,124.109) 105.493,124.638 ; P9.7@105.021,124.929 ccw(c105.493,125.167) 105.493,124.638 ; v1@160.981,134.365 cw(c160.915,134.139) 161.15,134.139 ; v1(161.05,134.6) 161.15,134.5 161.15,134.15 ; 161.15,134.25 cw(c161.4,134.25) v1@161.223,134.427 ; 161.16,134.15 161.16,133.41 152.245,124.495 147.105,124.495 146.605,124.995 144.792,124.995 144.702,125.085 139.638,125.085 139.627,125.095 130.984,125.095 130.889,125 130.83,125 130.82,125.01 125.33,125.01 125.32,125 124.297,125 124.292,125.005 120.321,125.005 119.861,125.465 118.188,125.465 117.308,124.585 115.809,124.585 115.286,125.107 108.007,125.107 107.422,125.693 106.548,125.693 105.493,124.638 ; v1(161.35,140.25) 163.615,142.515 163.615,144.364 174.35,155.099 174.35,159.35 v1(175.05,160.05) ; v1@161.35,140.495 ccw(c161.35,141.086) 161.768,140.668 ccw(c162.186,140.25) v1@161.595,140.25 ; v1@174.805,160.05 cw(c174.214,160.05) 174.632,159.632 cw(c175.05,159.214) v1@175.05,159.805
MMC2_DATA6: P9.5 P20.7 | length 107.1
  Top Layer w0.21: v1(162.2,133.85) 164.1,135.75 v1@164.1,140.3 ; v1@162.2,134.095 ccw(c162.2,134.686) 162.618,134.268 ccw(c163.036,133.85) v1@162.445,133.85 ; v1@163.877,140.077 cw(c163.338,139.538) 164.1,139.538 ; 164.1,139.779 cw(c164.521,139.779) v1@164.223,140.077 ; v1(180,160.8) 179.9,160.9 P20.7@181.6,160.9 ; v1@180.173,160.626 cw(c180.833,159.966) P20.7@180.833,160.9 ; v1@180.173,160.973 ccw(c180.349,161.149) 180.349,160.9 ; P20.7@180.747,160.797 ccw(c180.5,160.55) 180.5,160.9 ccw(c180.5,161.25) P20.7@180.747,161.003
  Bottom Layer w0.21: P9.5@104.445,122.098 105.493,122.098 ; P9.5@105.021,121.807 cw(c105.493,121.569) 105.493,122.098 ; P9.5@105.021,122.389 ccw(c105.493,122.627) 105.493,122.098 ; 161.747,133.417 cw(c162.2,132.965) v1@162.2,133.605 ; 161.796,133.466 ccw(c161.412,133.85) v1@161.955,133.85 ; v1@162.05,133.72 151.88,123.55 144.289,123.55 144.104,123.735 126.096,123.735 125.441,123.08 125.235,123.08 125.231,123.085 119.809,123.085 119.344,123.55 111.75,123.55 111.353,123.153 106.548,123.153 105.493,122.098 ; v1(164.05,140.25) 164,140.2 164.1,140.2 164.89,140.99 164.89,141.104 164.435,141.559 164.435,144.024 175.17,154.759 175.17,154.97 180.005,159.805 180.005,160.795 v1(180,160.8) ; v1@164.05,140.495 ccw(c164.05,141.328) 164.639,140.739 ; v1@164.295,140.25 cw(c164.645,140.25) 164.398,140.498 ; v1@179.826,160.626 cw(c179.395,160.195) 180.005,160.195 ; 180.005,160.221 cw(c180.578,160.221) v1@180.173,160.626
MMC2_DATA7: P9.3 P20.8 | length 113.9
  Top Layer w0.21: v1@157.6,135.235 ccw(c157.6,135.802) 158.001,135.401 ; v1@157.6,135.445 ccw(c157.6,136.519) 158.36,135.76 ; v1@157.65,135.05 159.4,136.8 159.4,142.389 171.956,154.945 172.018,154.945 173.6,156.527 173.6,159.526 174.974,160.9 P20.8@177.2,160.9 ; P20.8@176.347,160.797 ccw(c176.1,160.55) 176.1,160.9 ccw(c176.1,161.25) P20.8@176.347,161.003
  Bottom Layer w0.21: P9.3@104.445,119.558 105.493,119.558 ; P9.3@105.021,119.267 cw(c105.493,119.029) 105.493,119.558 ; P9.3@105.021,119.849 ccw(c105.493,120.087) 105.493,119.558 ; v1(157.6,135.2) 158.195,135.795 161.655,135.795 162.85,134.6 ; v1@157.6,135.445 ccw(c157.6,136.036) 158.018,135.618 ccw(c158.436,135.2) v1@157.845,135.2 ; 162.855,134.6 162.855,133.578 162.471,133.195 162.445,133.195 158.2,128.95 158.2,124 156.93,122.73 143.95,122.73 143.765,122.915 126.435,122.915 125.78,122.26 124.896,122.26 124.891,122.265 124.009,122.265 124.004,122.26 123.19,122.26 123.185,122.265 119.455,122.265 119.024,122.696 119.024,122.71 119.004,122.73 112.21,122.73 111.168,121.688 109.058,121.688 107.983,120.613 106.548,120.613 105.493,119.558
MSEN: R43.2 U7.11 | length 6.2
  Top Layer w0.2: U7.11@126.504,166.35 128.209,166.35 128.61,165.95 129.19,165.95 ; 129.408,166.168 cw(c129.809,165.766) R43.2@130.012,166.297 ; 129.626,166.386 cw(c129.93,166.082) R43.2@130.084,166.483 ; R43.2@129.764,166.294 ccw(c129.63,166.249) 129.63,166.39 ; R43.2@129.764,166.486 cw(c129.63,166.531) 129.63,166.39 ; R43.2@129.941,166.11 ccw(c129.689,165.451) 129.19,165.95 ; R43.2@130.048,166.39 129.63,166.39 ; 129.19,165.95 129.63,166.39
NetC5_2: C5.2 U2.17 | length 2.8
  Top Layer w0.4: U2.17@187.35,104.275 188.825,104.275 v3(189.2,103.9)
  Bottom Layer w0.5: v3(189.2,103.9) 189.25,103.95 C5.2@190,103.95
NetC12_1: C12.1 R5.2 U5.33 Y1.1 | length 20.7
  Top Layer w0.2: Y1.1@114.7,114 114.8,114 Y1.1@115,114 ; 115.972,116.672 ccw(c116.392,116.252) v3(115.8,116.2) 115.8,116.5 116.275,116.975 ; v3@115.999,116.217 cw(c116.949,116.301) 116.275,116.975 ; U5.33@121.56,116.975 116.275,116.975
  Top Layer w0.3: Y1.1@114.8,113.7 114.8,114 114.8,115.6 115.4,116.2 v3(115.8,116.2) ; Y1.1@114.861,115.661 cw(c115.8,114.722) v3@115.8,116.05 ; Y1.1@115.373,116.173 cw(c115.8,115.746) v3@115.8,116.35 ; v3@115.694,116.094 ccw(c115.438,115.838) 115.438,116.2 ccw(c115.438,116.562) v3@115.694,116.306
  Bottom Layer w0.2: R5.2@115.005,117.222 cw(c114.646,116.8) 115.2,116.8 ; R5.2@115.2,117.45 115.2,116.8 ; R5.2@115.395,117.222 ccw(c115.754,116.8) 115.2,116.8 ; v3@115.6,116.2 ccw(c115.117,116.2) 115.459,116.541 ccw(c115.8,116.883) v3@115.8,116.4 ; v3@115.8,116 cw(c115.8,115.517) 116.141,115.859 cw(c116.483,116.2) v3@116,116.2 ; v3@115.877,116.015 cw(c115.996,115.731) 116.15,115.998 cw(c116.304,116.265) v3@115.998,116.226 ; v3@115.994,116.248 ccw(c116.73,116.431) C12.1@116.351,115.775 ; 116.054,115.946 ccw(c116.449,116.341) C12.1@116.577,115.797 ; C12.1@116.531,115.992 cw(c116.352,116.752) v3(115.8,116.2) ; C12.1@116.6,115.7 116.3,115.7 v3(115.8,116.2) ; 115.2,116.8 v3(115.8,116.2)
NetC13_1: C13.1 R5.1 U5.32 Y1.2 | length 24
  Top Layer w0.2: Y1.2@114.9,121.5 Y1.2@114.9,121.7 ; v3@115.78,119.44 cw(c115.6,119.2) 115.9,119.2 ; v3@116.02,119.44 ccw(c116.2,119.2) 115.9,119.2 ; v3@116.099,119.576 ccw(c117.147,119.447) 116.4,118.7 ; 116.11,118.99 cw(c116.63,119.51) v3(115.9,119.6) 115.9,119.2 ; U5.32@121.56,117.475 118.125,117.475 116.9,118.7 116.4,118.7 ; 115.9,119.2 116.4,118.7
  Top Layer w0.3: Y1.2@114.8,122.3 114.8,120.7 v3(115.9,119.6) ccw(c115.363,119.063) Y1.2@115.049,119.754 ; Y1.2@114.924,120.027 cw(c115.172,119.484) 115.594,119.906 ; Y1.2@115.4,120.3 ccw(c115.883,120.3) Y1.2@115.541,119.959 ; v3@115.75,119.6 ccw(c115.388,119.6) 115.644,119.856 ccw(c115.9,120.112) v3@115.9,119.75 ; v3@115.755,119.561 ccw(c115.405,119.467) 115.586,119.781 ccw(c115.767,120.095) v3@115.861,119.745
  Bottom Layer w0.2: R5.1@115.2,118.7 115.2,118.9 v3(115.9,119.6) ; R5.1@115.2,119 ccw(c115.2,119.241) R5.1@115.371,119.071 ; R5.1@115.3,118.7 cw(c116.024,118.7) 115.512,119.212 ; R5.1@115.5,118.7 cw(c116.707,118.7) v3@115.854,119.554 ; 115.623,119.155 cw(c116.092,118.884) v3@115.952,119.407 ; 115.664,119.226 ccw(c115.296,119.438) v3@115.707,119.548 ; v3@115.7,119.6 cw(c115.217,119.6) 115.559,119.259 cw(c115.9,118.917) v3@115.9,119.4 ; v3@115.9,119.8 ccw(c115.9,120.283) 116.241,119.941 ccw(c116.583,119.6) v3@116.1,119.6 ; v3@115.986,119.781 ccw(c116.098,120.018) 116.23,119.791 ccw(c116.362,119.563) v3@116.099,119.584 ; v3@116.096,119.559 cw(c116.781,119.415) C13.1@116.431,120.021 ; 116.172,119.872 cw(c116.502,119.542) C13.1@116.583,120.002 ; C13.1@116.229,119.929 ccw(c116.059,120.1) C13.1@116.3,120.1 ; C13.1@116.548,119.805 ccw(c116.421,119.079) v3(115.9,119.6) ; C13.1@116.6,120.1 116.4,120.1 v3(115.9,119.6)
NetC14_2: C14.2 R7.1 U5.26 | length 7.9
  Top Layer w0.2: R7.1@120.05,122.4 121.5,122.4 122.96,120.94 U5.26@122.96,120.375 ; R7.1@120.101,122.258 cw(c120.443,121.916) 120.443,122.4 ; R7.1@120.242,122.117 cw(c120.926,121.433) 120.926,122.4 ; R7.1@120.242,122.541 ccw(c120.583,122.882) 120.583,122.4 ; 120.707,122.4 cw(c120.707,121.502) C14.2@121.342,122.137 ; 120.953,122.4 ccw(c120.953,122.95) C14.2@121.342,122.561 ; C14.2@121.554,122.049 cw(c121.554,121.332) 122.061,121.839 ; C14.2@121.854,122.349 ccw(c122.586,122.349) 122.068,121.832
NetC18_1: C18.1 C20.1 U5.34 | length 8.4
  Top Layer w0.2: v1@119.95,116.2 v1(119.95,116.3) 119.95,116.35 120.075,116.475 U5.34@121.56,116.475
  Bottom Layer w0.2: v1@119.95,116.2 v1@120.15,116.4 ; v1@119.985,116.265 cw(c120.312,115.938) 120.312,116.4 cw(c120.312,116.662) v1@120.127,116.477 ; v1@120.127,116.123 cw(c120.795,115.455) C20.1@120.795,116.4 ; 120.333,116.4 ccw(c120.333,116.979) C20.1@120.743,116.57 ; C20.1@120.739,116.149 ccw(c120.15,115.584) v1@120.15,116.4 ; C20.1@120.9,116.4 v1@120.15,116.4
  Bottom Layer w0.3: C20.1@120.778,116.534 ccw(c120.351,116.961) 120.955,116.961 ccw(c121.558,116.961) C20.1@121.132,116.534 ; C18.1@120.778,117.501 cw(c120.351,117.075) 120.955,117.075 cw(c121.558,117.075) C18.1@121.132,117.501 ; C20.1@120.955,116.395 C18.1@120.955,117.678
NetC22_1: C22.1 C24.1 U5.14 | length 8.6
  Top Layer w0.2: U5.14@127.36,117.475 129.175,117.475 C22.1@129.429,117.221 ; 128.076,117.475 cw(c128.076,115.884) C22.1@129.201,117.009 ; 128.558,117.475 cw(c128.558,116.366) C22.1@129.342,117.15 ; C22.1@129.041,117.475 cw(c129.041,116.849) C22.1@129.484,117.292 ; C22.1@129.35,117.2 129.371,117.221 C22.1@129.413,117.221 C22.1@129.429,117.221 ; C22.1@129.45,117.2 C22.1@129.429,117.221 ; C22.1@129.625,117.009 cw(c130.137,116.497) 130.137,117.221 cw(c130.137,117.945) C22.1@129.625,117.433 ; C24.1@130.598,117.009 ccw(c130.086,116.497) 130.086,117.221 ccw(c130.086,117.945) C24.1@130.598,117.433 ; C24.1@130.81,117.221 C22.1@129.429,117.221
NetC28_1: C28.1 C29.1 F1.1 P6.B1 | length 21.6
  Bottom Layer w0.5: C29.1@130.558,108.437 cw(c129.49,107.369) 131,107.369 ; F1.1@130.916,103.23 ccw(c131.479,103.793) 131.479,102.997 ; 131,106.944 cw(c133.111,106.944) C29.1@131.618,108.437 ; C29.1@131,109.15 131,106.9 130.81,106.71 F1.1@130.81,103.124 130.81,102.997 132.187,102.997 132.385,102.799 134.332,102.799 134.333,102.8 134.55,102.8 P6.B1@136.4,104.65 ; 135.49,103.74 ccw(c134.431,104.799) P6.B1@135.929,104.799 ; 135.78,104.03 cw(c136.429,103.382) P6.B1@136.429,104.299 ; P6.B1@136.075,105.152 ccw(c135.221,106.006) 136.429,106.006 ccw(c137.636,106.006) P6.B1@136.782,105.152 ; C28.1@136.3,106.45 136.429,106.321 P6.B1@136.429,104.799
NetC30_1: C30.1 C32.1 F2.1 P6.A1 | length 21.4
  Bottom Layer w0.5: C32.1@130.504,96.178 ccw(c129.634,97.214) 130.986,97.214 ; F2.1@130.704,101.494 cw(c130.351,101.141) 130.85,101.141 ; F2.1@130.85,101.8 F2.1@130.85,101.75 ; F2.1@130.916,101.494 cw(c131.534,100.876) 131.534,101.75 ; C32.1@130.986,95.504 130.986,97.214 ; C32.1@131.469,96.178 cw(c132.338,97.214) 130.986,97.214 ; 135.028,102.099 ccw(c135.028,103.579) P6.A1@136.075,102.532 ; 135.415,102.099 cw(c135.415,101.165) 136.075,101.825 cw(c135.221,100.972) 136.429,100.972 cw(c137.636,100.972) P6.A1@136.782,101.825 ; C30.1@136.35,100.1 136.429,100.179 P6.A1@136.429,102.179 136.349,102.099 132.665,102.099 132.316,101.75 F2.1@130.85,101.75 ; F2.1@130.85,101.75 130.85,97.35 130.986,97.214
NetC31_1: C31.1 C33.1 F3.1 P5.B1 | length 26.1
  Bottom Layer w0.2: P5.B1@113.741,105.221 ccw(c112.631,106.331) 114.2,106.331 ccw(c115.77,106.331) P5.B1@114.66,105.221 ; P5.B1@113.882,105.08 ccw(c113.114,105.848) 114.2,105.848 ccw(c115.287,105.848) P5.B1@114.519,105.08 ; C31.1@113.961,106.544 cw(c113.383,105.966) 114.2,105.966 ; P5.B1@114.2,104.5 P5.B1@114.2,104.761 C31.1@114.2,106.85 ; 114.2,106.098 cw(c114.831,106.098) C31.1@114.385,106.544
  Bottom Layer w0.5: C33.1@108.358,108.488 cw(c107.078,107.208) 108.888,107.208 cw(c110.699,107.208) C33.1@109.419,108.488 ; F3.1@108.6,102.85 108.6,106.9 108.888,107.188 C33.1@108.888,109.118 ; 108.6,103.503 ccw(c109.345,103.503) 108.818,102.976 ccw(c109.122,103.28) 109.122,102.85 ; F3.1@108.7,102.85 109.8,102.85 110.05,102.6 112.3,102.6 P5.B1@114.2,104.5 ; 113.162,103.462 ccw(c111.863,104.761) P5.B1@113.7,104.761 ; 113.792,104.092 cw(c114.2,103.684) P5.B1@114.2,104.261
NetC34_1: C34.1 C35.1 F4.1 P5.A1 | length 27.7
  Bottom Layer w0.2: P5.A1@113.741,101.682 cw(c112.452,100.393) C34.1@114.275,100.393 ; P5.A1@113.882,101.823 cw(c112.935,100.876) 114.275,100.876 ; P5.A1@114.024,101.965 cw(c113.418,101.359) 114.275,101.359 ; C34.1@114.038,100.21 ccw(c113.404,100.703) 114.195,100.843 ; C34.1@114.062,100.237 ccw(c113.55,100.749) 114.275,100.749 ccw(c114.999,100.749) C34.1@114.487,100.237 ; 114.239,100.598 ccw(c114.737,100.686) C34.1@114.447,100.271 ; C34.1@114.275,100.025 P5.A1@114.275,101.975 ; 114.275,100.751 cw(c115.591,100.751) P5.A1@114.66,101.682 ; 114.275,101.234 cw(c115.108,101.234) P5.A1@114.519,101.823
  Bottom Layer w0.5: C35.1@108.333,96.007 ccw(c107.662,96.678) 108.61,96.678 ; 108.61,96.69 ccw(c110.076,96.69) C35.1@109.04,95.654 ; 108.61,97.897 ccw(c111.283,97.897) C35.1@109.393,96.007 ; 108.61,100.739 cw(c109.319,100.739) 108.818,101.24 cw(c109.258,100.8) 109.258,101.422 ; C35.1@108.9,95.55 108.61,95.84 108.61,101.422 109.798,101.422 110.157,101.781 112.104,101.781 112.463,101.422 113.372,101.422 ; 113.424,101.474 ccw(c112.756,102.141) P5.A1@113.7,102.141 ; P5.A1@114.1,102.15 113.372,101.422 ; P5.A1@114.108,101.65 ccw(c113.956,100.838) 113.372,101.422
NetC44_1: C44.1 P7.3 P7.6 R15.1 | length 20.1
  Top Layer w0.5: P7.6@158.74,105 ccw(c158.74,105.99) 159.44,105.29 ; P7.6@158.75,104.6 159.8,105.65 160.733,105.65 162.123,107.04 P7.3@162.55,107.04 ccw(c162.55,106.009) 161.821,106.738 ; P7.6@159.24,104.5 cw(c160.664,104.5) 159.657,105.507 ; 160.967,105.884 cw(c162.55,104.302) P7.3@162.55,106.54
  Bottom Layer w0.5: P7.6@158.386,104.146 cw(c157.509,103.269) 158.75,103.269 ; C44.1@158.75,102.184 P7.6@158.75,104.25 ; 158.75,103.317 cw(c159.923,103.317) P7.6@159.094,104.146 ; P7.3@162.196,106.686 cw(c161.012,105.502) 162.687,105.502 ; 162.62,102.759 ccw(c163.211,102.759) R15.1@162.793,102.341 ; R15.1@162.687,102.235 162.62,102.302 162.62,105.064 162.687,105.131 P7.3@162.687,106.713 ; 162.687,106.164 cw(c163.426,106.164) P7.3@162.904,106.686
NetC51_1: C51.1 P8.3 P8.6 R27.2 | length 15.8
  Bottom Layer w0.5: P8.6@196.624,104.014 cw(c196.556,103.728) 196.85,103.728 cw(c197.309,103.728) P8.6@197.037,104.098 ; P8.6@196.74,104.5 ccw(c198.319,104.5) 197.203,103.383 ; P8.6@196.85,104.45 196.85,103.736 C51.1@198.287,102.299 199.649,102.299 R27.2@199.65,102.3 ; P8.6@197.24,104.5 ccw(c200.026,104.5) C51.1@198.056,102.53 ; 197.931,102.747 ccw(c198.494,103.072) C51.1@198.326,102.444 ; R27.2@199.735,102.304 199.735,103.258 200.48,104.003 200.48,106.88 P8.3@200.6,107 ; P8.3@200.196,106.686 cw(c199.512,106.002) 200.48,106.002 ; 200.48,105.664 cw(c201.926,105.664) P8.3@200.904,106.686
NetC62_2: C62.2 R44.2 R46.1 | length 6.5
  Bottom Layer w0.5: R46.1@168.91,174.371 171.079,174.371 171.1,174.35 R44.2@171.1,177.55 ; 170.659,174.371 cw(c170.659,173.941) C62.2@170.963,174.245 ; C62.2@170.963,174.457 ccw(c170.632,174.788) 171.1,174.788 ; R44.2@170.963,177.46 cw(c170.632,177.129) 171.1,177.129